# Altium PCB ATRACK_KEY_V1.PcbDoc
Units mm, origin at the board's own origin, x right, y up, seen from the top; angles counter-clockwise.
Board outline 27.6 x 14 mm, 2 copper layers (Top Layer, Bottom Layer); 17 components, 15 nets, 56 pads, 0 vias.
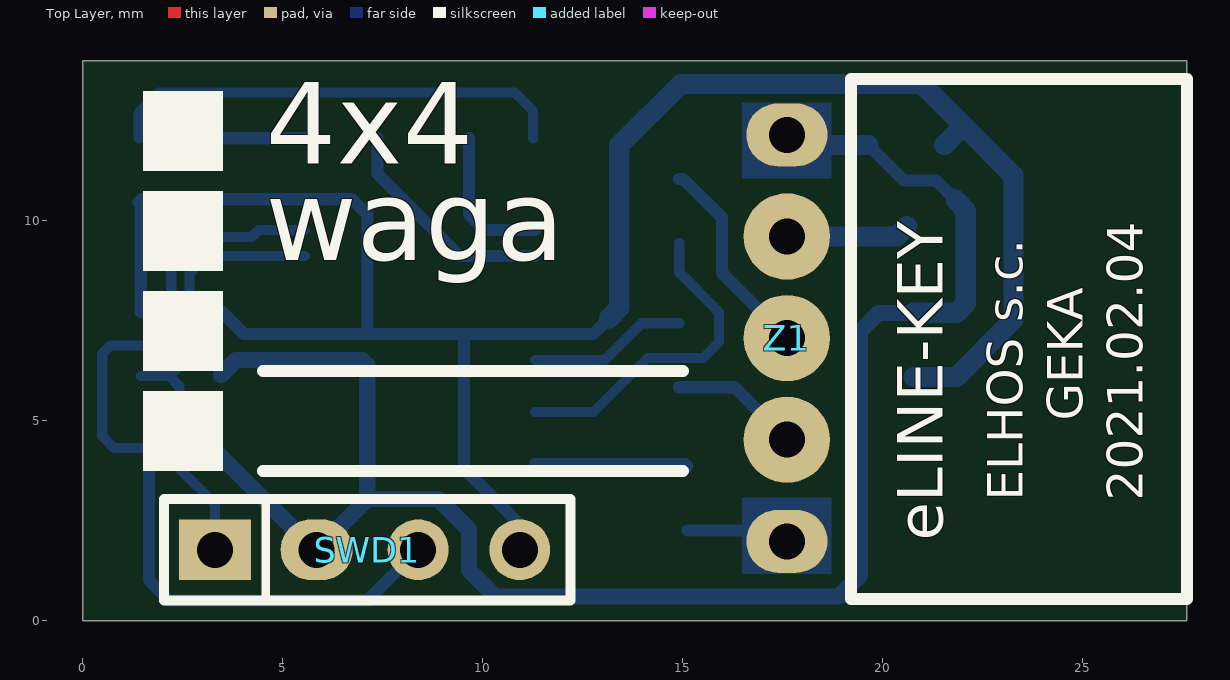
[diagram p0: Top Layer view]
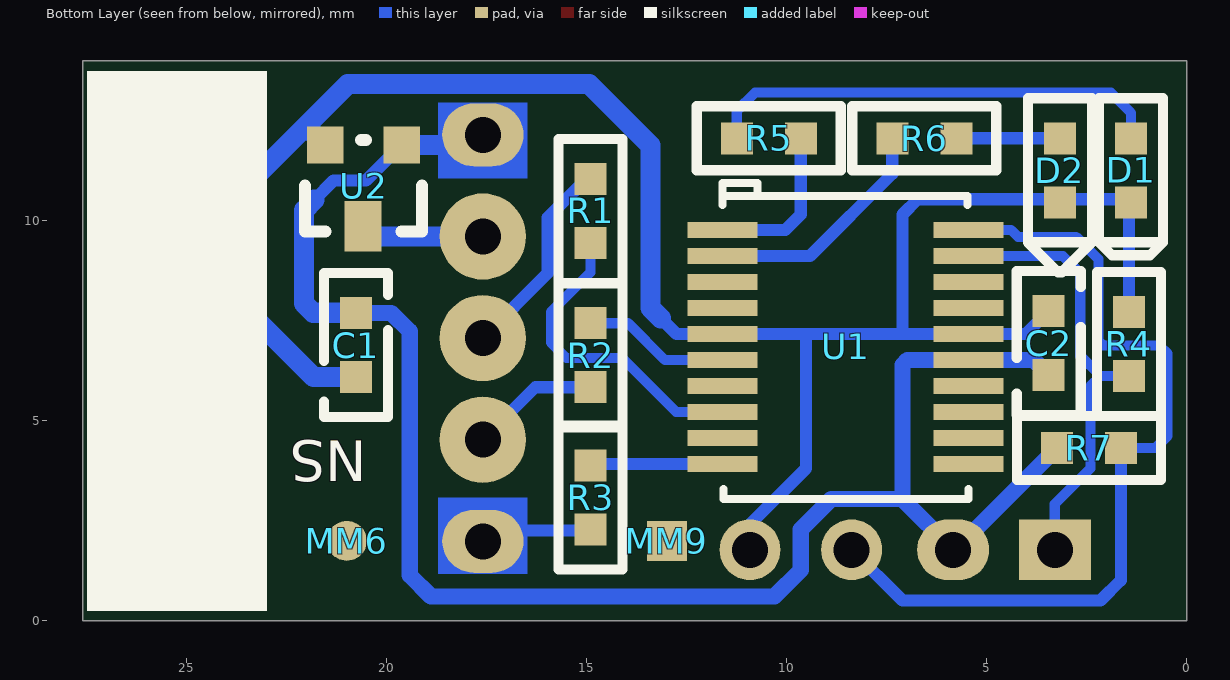
[diagram p1: Bottom Layer view, seen from below]

## Layer stack, top to bottom
Top Layer: signal copper 0.0356
Dielectric: dielectric 0.32, FR-4, Dk 4.8
Bottom Layer: signal copper 0.0356

## Board outline
27.6,14 0,14 0,0 27.6,0

## Design rules (kind name [scope] priority, off if disabled: settings)
Clearance [All] p1: gap=0.203
ComponentClearance [All] p1 off: gap=0.254 collisioncheckmode=3 verticalgap=0.254 showdistances=FALSE
HoleSize [All] p1: absolutevalues=TRUE maxlimit=5.08 minlimit=0.3 maxpercent=80.000 minpercent=20.000
MinimumSolderMaskSliver [All] p1: minsoldermaskwidth=0.102
PolygonConnect [All] p1: connectstyle=Relief reliefconductorwidth=0.254 reliefentries=4 polygonreliefangle="90 Angle"
RoutingVias [All] p1: holewidth=0.5 width=1.016 viastyle="Through Hole" minholewidth=0.3 minwidth=0.635 maxholewidth=5 maxwidth=5.08
SilkToSilkClearance [All] p1: silktosilkclearance=0.102
SilkscreenOverComponentPads [All] p1: minsilkscreentomaskgap=0.102
SolderMaskExpansion [All] p1: expansion=0.102
Width [All] p1: maxlimit=2.54 minlimit=0.254 preferedwidth=0.254 minimp=50.000000 maximp=50.000000 favimp=50.000000
23 further rules are at their usual default settings.

## Components (designator, comment, footprint, x,y, rotation, side; value= is the part's Value field where it differs from the comment)
C1 "100n" 0603C 20.775,5.996 r270 bottom
C2 "100n" 0603C 3.454,7.847 r90 bottom
D1 "" 0603LG 1.397,12.165 r90 bottom
D2 "" 0603LR 3.175,12.165 r90 bottom
MM6 "" REF_CIR 21,2 r180 bottom
MM9 "" REF_SQR 13,2 r180 bottom
R1 "33R" 0603R 14.91,9.349 r270 bottom
R2 "33R" 0603R 14.91,7.542 r90 bottom
R3 "33R" 0603R 14.91,3.988 r90 bottom
R4 "10k" 0603R 1.448,7.822 r90 bottom
R5 "1k" 0603R 11.352,12.065 r0 bottom
R6 "1k" 0603R 5.666,12.065 r180 bottom
R7 "10k" 0603R 3.351,4.318 r0 bottom
SWD1 "ST-LINK" PIN4 3.302,1.778 r0 top
U1 "STM32L011F4P6" TSSOP20 11.608,9.772 r270 bottom
U2 "MCP1700T-3302E/TT" SOT-23 19.632,11.896 r180 bottom
Z1 "ZL263-5SG" PIN5_ZL 17.6,12.15 r270 top locked

## Footprints (in the part's own frame and the unit in brackets; to place one, negate y for a bottom-side part, rotate by r counter-clockwise, add the part's x,y. Pads: shape width x height; smd on the part's side, far side on the other; paste and mask are expansions set on the pad)
0603C [mm]
  rect 0.8x0.8 smd: 1(-0.1,0) 2(-1.7,0)
  silkscreen extent -2.7,-0.8 0.9,0.8
0603LG [mm]
  rect 0.8x0.8 smd: A(-1.7,0) K(-0.1,0)
  silkscreen extent -3.03,-0.8 0.9,0.8
0603LR [mm]
  rect 0.8x0.8 smd: A(-1.7,0) K(-0.1,0)
  silkscreen extent -3.45,-0.8 0.9,0.8
0603R [mm]
  rect 0.8x0.8 smd: 1(-0.1,0) 2(-1.7,0)
  silkscreen extent -2.7,-0.8 0.9,0.8
PIN4 [mm]
  rect 1.8x1.524 hole 0.9: 1(0,0)
  oval 1.8x1.524 hole 0.9: 2(2.54,0)
  round 1.524 hole 0.9: 3(5.08,0) 4(7.62,0)
  silkscreen extent -1.27,-1.27 8.89,1.27
PIN5_ZL [mil]
  oval 62x80 hole 35.43: 1(0,0) 5(400,0)
  round 85 hole 35.43: 2(100,0) 3(200,0) 4(300,0)
  silkscreen extent -55,63 457,394
REF_CIR [mm]
  round 1 smd paste-0.5 mask+0.5: 0(0,0)
REF_SQR [mm]
  rect 1x1 smd paste-0.5 mask+0.5: ""(0,0)
SOT-23 [mil]
  rect 36x36 smd: 1(0,0) 2(-75,0)
  rect 36x50 smd: 3(-38,-80)
  silkscreen extent -95,-85 20,5
TSSOP20 [mm]
  rect 0.4x1.75 smd mask+0.152: 1(0,0) 2(0.65,0) 3(1.3,0) 4(1.95,0) 5(2.6,0) 6(3.25,0) 7(3.9,0) 8(4.55,0) 9(5.2,0) 10(5.85,0) 11(5.85,6.15) 12(5.2,6.15) 13(4.55,6.15) 14(3.9,6.15) 15(3.25,6.15) 16(2.6,6.15) 17(1.95,6.15) 18(1.3,6.15) 19(0.65,6.15) 20(0,6.15)
  silkscreen extent -1.17,0 6.73,6.15

## Part data
C1 C2: library part CAP
D1 D2: library part LED
MM6 MM9: library part MECH
R1 R2 R3 R4 R5 R6 R7: library part RES3
SWD1: library part SW_CON, "Header, 4-Pin"
Z1: library part CON5, "Connector"

## Nets (pads, with @x,y where several pads share a name; then routed paths per layer and width w, separated by ;. In a path a pad name is that pad's centre, name@x,y a point inside that pad or via, vN(x,y) a via of type N, cw(c..) or ccw(c..) an arc to the next point about the centre after c; other vN are vias at no path point)
F500: R3.1 U1.10 | length 3.8
  Bottom Layer w0.305: U1.10@11.303,3.922 U1.10 15.052,3.922 R3.1@15.113,3.861
GND: C1.2 C2.2 R7.1 SWD1.2 U1.15 U2.1 Z1.1 | length 42.9
  Bottom Layer w0.305: U2.1 20.521,11.007 21.334,11.007 21.817,10.525
  Bottom Layer w0.406: R7.1 5.791,1.778 SWD1.2 7.112,3.048 ; C2.2 3.83,6.522 5.553,6.522 6.985,6.522 7.112,6.395 7.112,3.048 ; C1.2 19.888,7.696 19.431,7.239 19.431,1.143 18.898,0.61 10.312,0.61 9.652,1.27 9.652,2.286 8.89,3.048 7.112,3.048
  Bottom Layer w0.508: Z1.1@18.032,11.896 U2.1 ; C1.2@20.775,7.705 21.842,7.705 22.071,7.934 22.071,10.271 21.817,10.525
LED1: R5.2 U1.1 | length 3.7
  Bottom Layer w0.305: R5.2 9.652,10.16 10.04,9.772 U1.1@11.303,9.772
LED2: R6.2 U1.2 | length 5.7
  Bottom Layer w0.305: R6.2 7.366,11.176 9.42,9.122 U1.2@11.303,9.122
NetD1_K: D1.K R5.1 | length 11.6
  Bottom Layer w0.254: D1.K 1.397,12.7 1.905,13.208 10.795,13.208 11.252,12.751 R5.1
NetD2_K: D2.K R6.1 | length 2.6
  Bottom Layer w0.305: D2.K R6.1
NetR1_2: R1.2 Z1.3 | length 5.9
  Bottom Layer w0.305: R1.2 15.012,11.049 15.977,10.084 15.977,8.694 Z1.3 Z1.3@16.838,7.07
NetR2_2: R2.2 Z1.4 | length 3.2
  Bottom Layer w0.305: R2.2 16.289,5.842 Z1.4
NetR3_2: R3.2 Z1.5 | length 2.6
  Bottom Layer w0.305: R3.2@15.113,2.261 17.33,2.261 Z1.5
RX: R2.1 U1.6 | length 4
  Bottom Layer w0.254: U1.6@11.303,6.522 U1.6 13.05,6.522 13.97,7.442 R2.1
SWCLK: R7.2 SWD1.3 U1.20 | length 21.7
  Bottom Layer w0.254: R7.2 0.787,4.318 0.483,4.623 0.483,6.68 0.686,6.883 2.083,6.883 2.21,7.01 2.21,9.042 2.769,9.601 4.223,9.601 4.394,9.772 U1.20@5.553,9.772
  Bottom Layer w0.305: R7.2 1.651,1.016 2.159,0.508 7.112,0.508 SWD1.3
SWDIO: R4.2 SWD1.1 U1.19 | length 11.4
  Bottom Layer w0.254: R4.2 2.159,6.122 ; SWD1.1 3.302,2.921 2.413,3.81 2.413,5.868 2.159,6.122 ; U1.19@5.553,9.122 3.102,9.122 2.667,8.687 2.667,6.629 2.159,6.122
TX: R1.1 U1.8 | length 8.2
  Bottom Layer w0.254: U1.8@11.303,5.222 U1.8 12.766,5.222 14.116,6.572 15.513,6.572 15.9,6.96 15.9,7.722 14.91,8.712 R1.1
VC3: C1.1 C2.1 D1.A D2.A R4.1 SWD1.4 U1.5 U1.16 U2.2 | length 51
  Bottom Layer w0.305: R4.1 1.448,10.414 D1.A 1.473,10.541 6.731,10.541 7.112,10.16 7.112,7.172 ; C2.1 4.029,7.172 5.553,7.172 7.112,7.172 ; SWD1.4 10.922,2.413 9.525,3.81 9.525,7.172 ; 13.157,7.569 12.76,7.172 11.303,7.172 9.525,7.172 ; 7.112,7.172 9.525,7.172
  Bottom Layer w0.508: 13.157,7.569 13.411,7.823 13.411,11.887 14.944,13.42 20.979,13.42 22.08,12.319 ; C1.1 21.833,6.096 23.265,7.527 23.265,11.134 22.08,12.319 ; U2.2 21.96,12.319 22.08,12.319
VC5: U2.3 Z1.2 | length 3.1
  Bottom Layer w0.508: Z1.2 20.344,9.61 U2.3
pads on no net: MM6.0 MM9. U1.3 U1.4 U1.7 U1.9 U1.11 U1.12 U1.13 U1.14 U1.17 U1.18

## Other copper
Bottom Layer:
  region net NetR3_2: 18.718,3.082 16.483,3.082 16.483,1.177 18.718,1.177
  rectangle net GND: 16.483,11.058 18.718,12.963

## Silkscreen, mask and mechanical layers (free items; w line width, h text height)
Top Overlay:
  rectangle: 1.5,3.75 3.5,5.75
  rectangle: 1.5,6.25 3.5,8.25
  rectangle: 1.5,8.75 3.5,10.75
  rectangle: 1.5,11.25 3.5,13.25
  lines w0.305: 4.5,3.75 15,3.75 ; 4.5,6.25 15,6.25
  text "4x4" at 4.572,11.43 h2.03
  text "waga" at 4.572,9.017 h2.03
  text "GEKA" at 25,5 h0.89 r90
  text "ELHOS s.c." at 23.5,3 h0.89 r90
  text "2021.02.04" at 26.5,3 h0.89 r90
  text "eLINE-KEY" at 21.5,2 h1.14 r90
Bottom Overlay:
  rectangle: 23,0.25 27.5,13.75
  text "NS" at 20.5,4.5 h1.02 r180
Mechanical 1:
  the board outline again, w0.305
ERROR:
  lines w0.254: 9.093,10.312 10.033,10.312 10.058,10.338 9.779,10.338 10.439,10.338 ; 9.703,11.989 9.703,11.379 9.881,11.201 12.116,11.201 13.208,10.109 13.208,8.763 12.903,8.458 11.684,8.458